# Altium PCB PCB7.pcbdoc
Units mil, origin at the board's own origin, x right, y up, seen from the top; angles counter-clockwise.
Board outline 1995.04 x 1323.62 mil, 2 copper layers (Top Layer, Bottom Layer); 6 components, 6 nets, 24 pads, 0 vias.
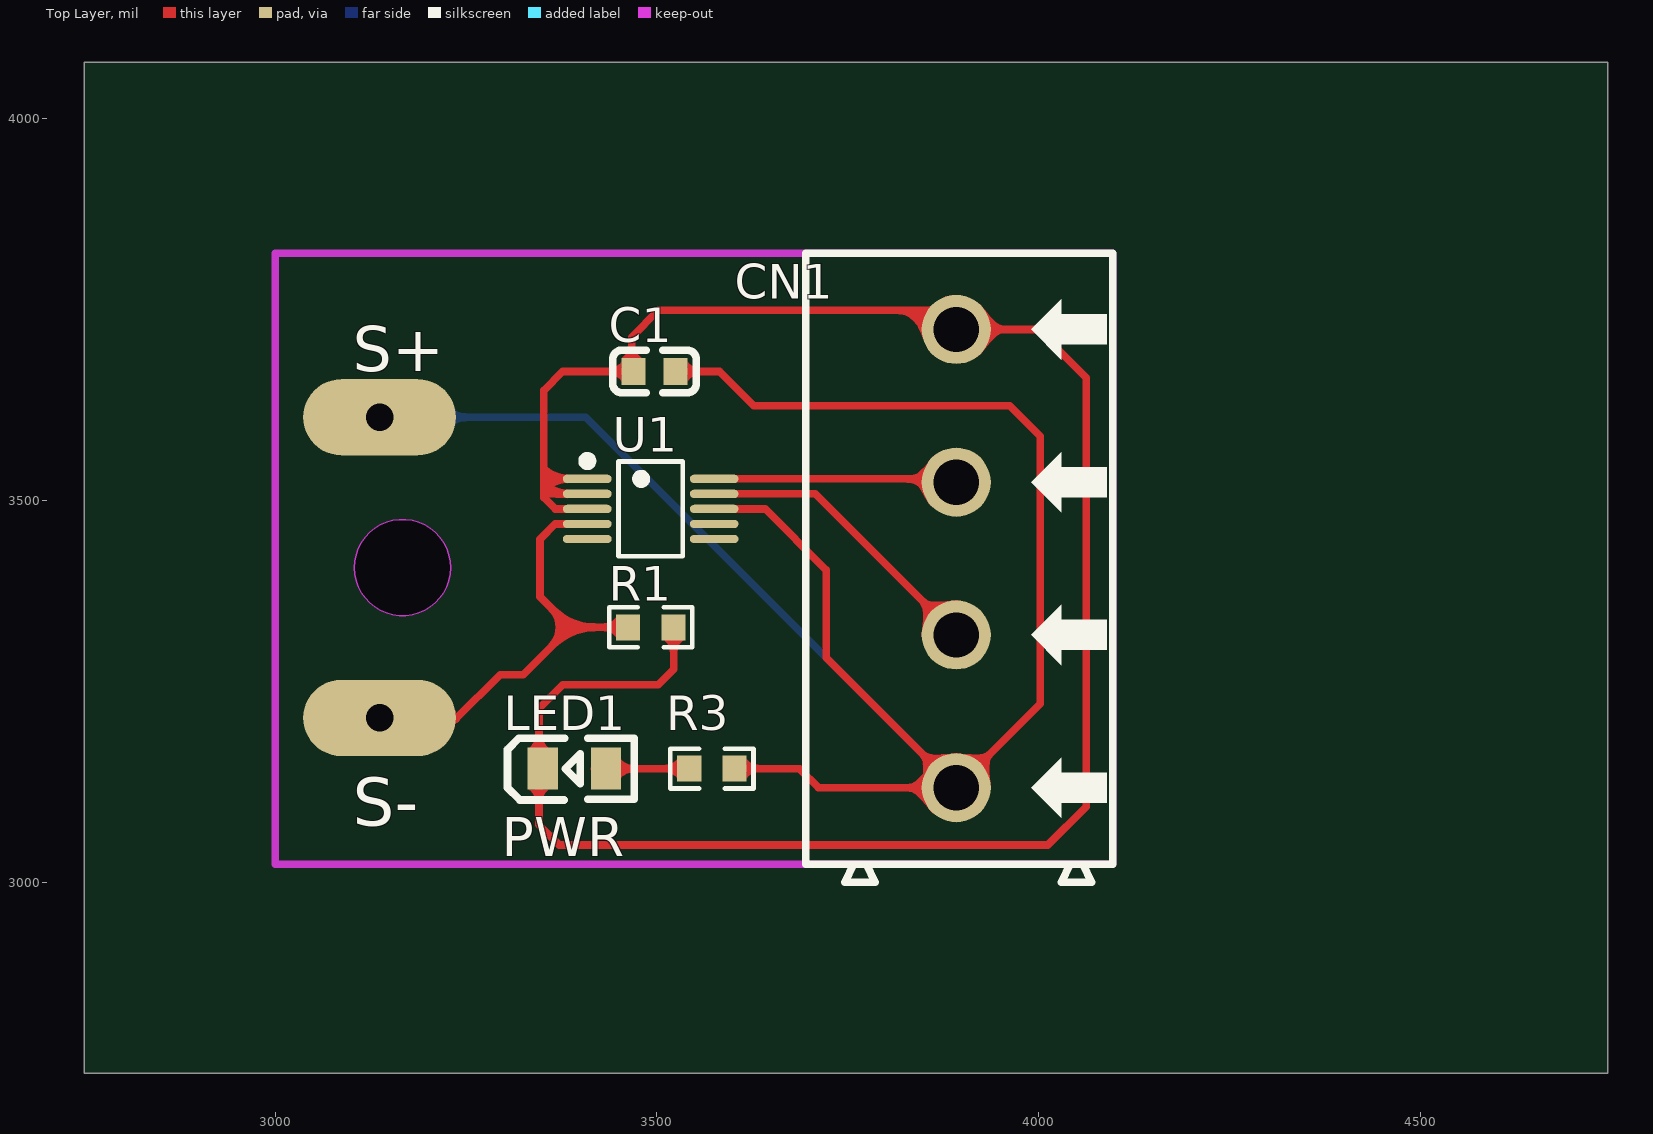
[diagram p0: Top Layer view]
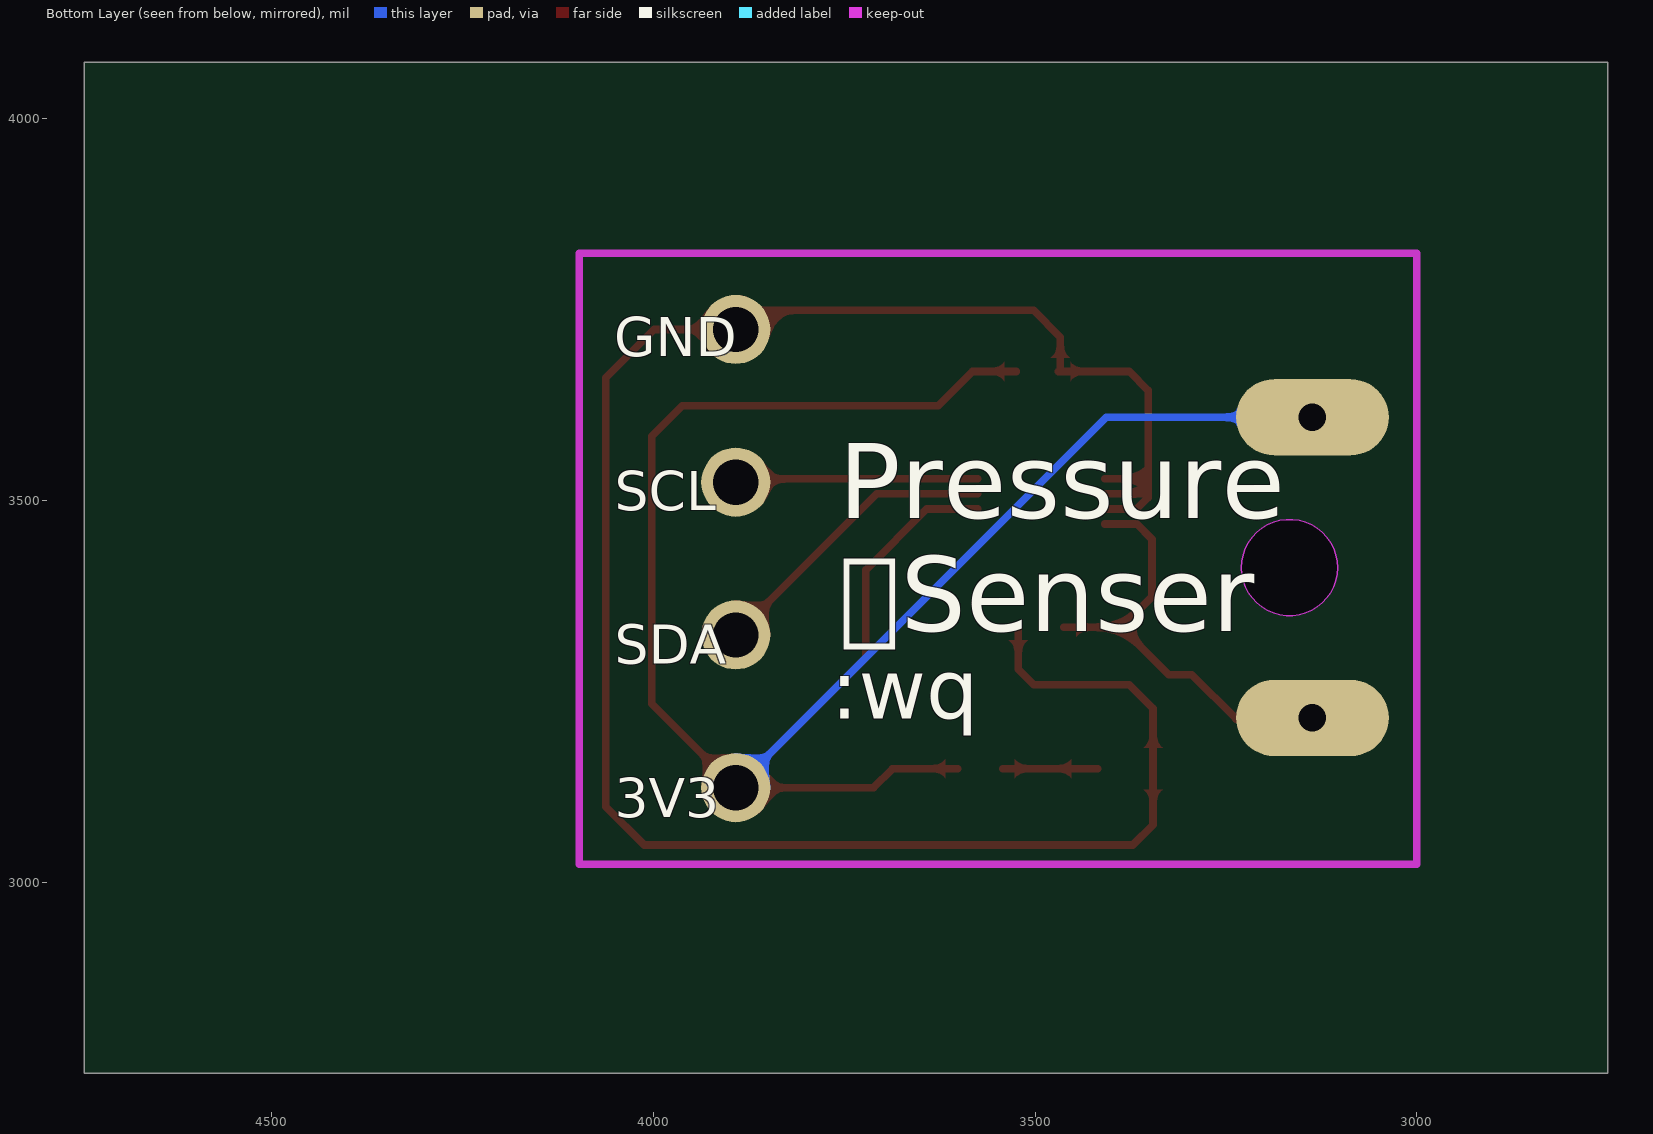
[diagram p1: Bottom Layer view, seen from below]

## Layer stack, top to bottom
Top Layer: signal copper (thickness not stored)
Dielectric: dielectric 12.6, FR-4, Dk 4.8
Bottom Layer: signal copper (thickness not stored)

## Board outline
4745.04,2750 2750,2750 2750,4073.62 4745.04,4073.62
cut-out: 3229.84,3411.81 cw(c3166.85,3411.81) 3103.86,3411.81 cw(c3166.85,3411.81)

## Design rules (kind name [scope] priority, off if disabled: settings)
BoardOutlineClearance copperThickness1oz [All] p0: genericclearance=10 ignorepadtopadclearanceinfootprint=FALSE except(0: Arc-SplitContinuation Track-SplitContinuation SMDPad-SplitContinuation THPad-SplitContinuation Via-SplitContinuation Fill-SplitContinuation Poly-SplitContinuation Region-SplitContinuation Text-SplitContinuation; 6: Track-CutoutEdge SMDPad-CutoutEdge THPad-CutoutEdge Via-CutoutEdge Region-CutoutEdge; 11.8: Track-OutlineEdge SMDPad-OutlineEdge THPad-OutlineEdge Via-OutlineEdge Fill-OutlineEdge Region-OutlineEdge Poly-OutlineEdge Text-OutlineEdge Fill-CutoutEdge)
BoardOutlineClearance copperThickness2oz [All] p0: genericclearance=10 ignorepadtopadclearanceinfootprint=FALSE except(0: Arc-SplitContinuation Track-SplitContinuation SMDPad-SplitContinuation THPad-SplitContinuation Via-SplitContinuation Fill-SplitContinuation Poly-SplitContinuation Region-SplitContinuation Text-SplitContinuation; 6: Track-CutoutEdge SMDPad-CutoutEdge THPad-CutoutEdge Via-CutoutEdge Region-CutoutEdge; 11.8: Track-OutlineEdge SMDPad-OutlineEdge THPad-OutlineEdge Via-OutlineEdge Fill-OutlineEdge Region-OutlineEdge Poly-OutlineEdge Text-OutlineEdge Fill-CutoutEdge)
Clearance copperThickness1oz [(InNet('VCC') OR InNet('GND') OR InNet('SCL') OR InNet('SDA') OR InNet('$1N415') OR InNet('$1N872'))] p1: gap=7 ignorepadtopadclearanceinfootprint=FALSE except(4: Track-Track; 6: Track-SMDPad SMDPad-SMDPad Track-THPad SMDPad-THPad THPad-THPad Track-Via SMDPad-Via THPad-Via Via-Via SMDPad-Fill THPad-Fill Via-Fill Fill-Fill Track-Region SMDPad-Region THPad-Region Via-Region Region-Region Track-Poly SMDPad-Poly THPad-Poly Via-Poly Fill-Poly Region-Poly Poly-Poly Track-Text SMDPad-Text THPad-Text Via-Text Fill-Text Region-Text Poly-Text Text-Text; 6.9: Track-Hole SMDPad-Hole THPad-Hole Via-Hole Fill-Hole Region-Hole Poly-Hole Text-Hole Sheet-Hole; 11.8: Track-Fill Fill-Region Track-Sheet SMDPad-Sheet THPad-Sheet Via-Sheet Fill-Sheet Region-Sheet Poly-Sheet Text-Sheet)
Clearance copperThickness2oz [All] p1: gap=7 ignorepadtopadclearanceinfootprint=FALSE except(6: Track-SMDPad SMDPad-SMDPad Track-THPad SMDPad-THPad THPad-THPad Track-Via SMDPad-Via THPad-Via Via-Via SMDPad-Fill THPad-Fill Via-Fill Fill-Fill Track-Region SMDPad-Region THPad-Region Via-Region Region-Region Track-Poly SMDPad-Poly THPad-Poly Via-Poly Fill-Poly Region-Poly Poly-Poly Track-Text SMDPad-Text THPad-Text Via-Text Fill-Text Region-Text Poly-Text Text-Text; 6.9: Track-Hole SMDPad-Hole THPad-Hole Via-Hole Fill-Hole Region-Hole Poly-Hole Text-Hole Sheet-Hole; 8: Track-Track; 11.8: Track-Fill Fill-Region Track-Sheet SMDPad-Sheet THPad-Sheet Via-Sheet Fill-Sheet Region-Sheet Poly-Sheet Text-Sheet)
DiffPairsRouting differentialPair [All] p1: maxuncoupledlength=10 minlimit=6 maxlimit=6 mostfreqgap=6 toplayer_minwidth=5 toplayer_prefwidth=10 toplayer_maxwidth=100 bottomlayer_minwidth=5 bottomlayer_prefwidth=10 bottomlayer_maxwidth=100
PasteMaskExpansion pasteMaskExpansion [All] p1: expansion=0
PlaneConnect innerPlane [All] p1: planeconnectstyle=Relief reliefexpansion=20 reliefentries=4 reliefconductorwidth=10 reliefairgap=10
PolygonConnect copperRegion [All] p1: connectstyle=Relief reliefentries=4 reliefconductorwidth=10 polygonreliefangle="90 Angle" airgapwidth=10
RoutingVias viaSize [All] p1: viastyle="Through Hole" holewidth=12.0078 minholewidth=11.811 maxholewidth=248.0314 width=24.0158 minwidth=19.685 maxwidth=393.7008
SolderMaskExpansion solderMaskExpansion [All] p1: useseparateexpansions=TRUE expansion=2 expansionbottom=2
Width copperThickness1oz [All] p1: maxlimit=100 minlimit=5 preferedwidth=10
Width copperThickness2oz [All] p1: maxlimit=100 minlimit=8 preferedwidth=10

## Components (designator, comment, footprint, x,y, rotation, side; value= is the part's Value field where it differs from the comment)
C1 "CGA0603X7R104K500JT" C0603 3496.85,3668.62 r0 top
CN1 "DB128V-5.08-4P-GN-S" CONN-TH_4P-P5.08_DIBO_DB128V-5.08 3891.85,3423.62 r90 top
LED1 "NCD0805R1" LED0805-R-RD 3391.85,3148.62 r0 top
R1 "FRC0603J103 TS" R0603 3491.85,3333.62 r180 top
R3 "0603WAF1000T5E" R0603 3571.85,3148.62 r180 top
U1 "ADS1115IDGSR" MSOP-10_L3.0-W3.0-P0.50-LS5.0-BL 3491.85,3488.62 r270 top

## Footprints (in the part's own frame and the unit in brackets; to place one, negate y for a bottom-side part, rotate by r counter-clockwise, add the part's x,y. Pads: shape width x height; smd on the part's side, far side on the other; paste and mask are expansions set on the pad)
C0603 [mm]
  rect 0.8x0.9 smd: 1(-0.7,0) 2(0.7,0)
  silkscreen extent -1.39,-0.71 1.39,0.71
CONN-TH_4P-P5.08_DIBO_DB128V-5.08 [mm]
  round 2.3 hole 1.5: 1(-7.62,0) 2(-2.54,0) 3(2.54,0) 4(7.62,0)
  silkscreen extent -10.76,-5.2 10.16,5
LED0805-R-RD [mm]
  rect 1x1.4 smd: 1(1.05,0) 2(-1.05,0)
  silkscreen extent -2.22,-1.04 1.99,1.01
MSOP-10_L3.0-W3.0-P0.50-LS5.0-BL [mm]
  oval 0.28x1.62 smd: 1(-1,-2.11) 2(-0.5,-2.11) 3(0,-2.11) 4(0.5,-2.11) 5(1,-2.11) 6(1,2.11) 7(0.5,2.11) 8(0,2.11) 9(-0.5,2.11) 10(-1,2.11)
  silkscreen extent -1.74,-2.26 1.58,1.07
R0603 [mil]
  rect 31.75x34.02 smd: 1(-29.66,0) 2(29.66,0)
  silkscreen extent -55,-26 55,26

## Free pads (board coordinates)
  oval 200x100 hole 36: 1(3136.85,3214.96) 1(3136.85,3608.66)

## Nets (pads, with @x,y where several pads share a name; then routed paths per layer and width w, separated by ;. In a path a pad name is that pad's centre, name@x,y a point inside that pad or via, vN(x,y) a via of type N, cw(c..) or ccw(c..) an arc to the next point about the centre after c; other vN are vias at no path point)
$1N415: pad.1@3136.85,3214.96 R1.2 U1.4 | length 645.3
  Top Layer w10: pad.1@3068.7,3213.62 3236.85,3213.62 3294.97,3271.75 3324.97,3271.75 3386.85,3333.62 ; U1.4 3366.85,3468.93 3346.85,3448.93 3346.85,3373.62 3386.85,3333.62 ; R1.2 3386.85,3333.62
$1N872: LED1.1 R3.2 | length 124
  Top Layer w10: LED1.1@3418.2,3148.62 R3.2
GND: C1.1 CN1.4 LED1.2 R1.1 U1.1 U1.2 U1.3 | length 2853.4
  Top Layer w10: U1.3 3366.85,3488.62 3351.85,3503.62 ; U1.2 3356.53,3508.3 3351.85,3503.62 ; U1.1 3354.07,3527.99 3351.85,3525.77 ; C1.1 C1.1@3466.85,3668.62 ; R1.1@3521.85,3333.62 3521.85,3278.62 3501.85,3258.62 3376.85,3258.62 3345.5,3227.27 3345.5,3074.97 3371.85,3048.62 4011.85,3048.62 4061.85,3098.62 4061.85,3660.47 3998.7,3723.62 CN1.4 3866.85,3748.62 3501.85,3748.62 3466.85,3713.62 C1.1@3466.85,3668.62 ; 3351.85,3503.62 3351.85,3525.77 ; 3351.85,3525.77 3351.85,3643.62 3376.85,3668.62 C1.1@3466.85,3668.62
SCL: CN1.3 U1.10 | length 318.7
  Top Layer w10: U1.10 3887.48,3527.99 CN1.3
SDA: CN1.2 U1.9 | length 393.4
  Top Layer w10: U1.9 3707.17,3508.3 CN1.2
VCC: C1.2 CN1.1 pad.1@3136.85,3608.66 R3.1 U1.8 | length 2877.1
  Top Layer w10: C1.2 3581.85,3668.62 3626.85,3623.62 3961.85,3623.62 4001.85,3583.62 4001.85,3233.62 CN1.1 ; U1.8 3641.85,3488.62 3721.85,3408.62 3721.85,3293.62 CN1.1 ; R3.1 3686.6,3148.62 3711.6,3123.62 CN1.1
  Bottom Layer w10: pad.1@3070,3608.62 3406.85,3608.62 CN1.1
pads on no net: U1.5 U1.6 U1.7

## Keep-outs
Board Outline Layer:
  circle w1: c3166.85,3411.81 r62.99
  region: 3229.84,3411.81 cw(c3166.85,3411.81) 3103.86,3411.81 cw(c3166.85,3411.81)
  lines w10: 3000,3023.62 4096.57,3023.62 4096.57,3823.62 3000,3823.62 3000,3023.62

## Other copper
Top Layer:
  region net VCC: 3555.16,3673.62 3555.16,3663.62 ccw(c3555.16,3644.87) 3540.16,3656.12 3540.16,3681.12 ccw(c3555.16,3692.37)
  region net GND: 3438.54,3663.62 3438.54,3673.62 ccw(c3438.54,3692.37) 3453.54,3681.12 3453.54,3656.12 ccw(c3438.54,3644.87)
  region net GND: 3461.85,3701.34 3471.85,3701.34 ccw(c3490.6,3701.34) 3479.35,3686.34 3454.35,3686.34 ccw(c3443.1,3701.34)
  region net $1N415: 3431.31,3328.62 3431.31,3338.62 ccw(c3431.31,3357.37) 3446.31,3346.12 3446.31,3321.12 ccw(c3431.31,3309.87)
  region net GND: 3526.85,3301.61 3516.85,3301.61 ccw(c3498.1,3301.61) 3509.35,3316.61 3534.35,3316.61 ccw(c3545.6,3301.61)
  region net GND: 3367.4,3522.99 3367.4,3532.99 3377.34,3533.25 3382.4,3533.5 3382.4,3522.48 3377.34,3522.74
  region net GND: 3367.4,3503.3 3367.4,3513.3 3377.34,3513.56 3382.4,3513.81 3382.4,3502.79 3377.34,3503.05
  region net GND: 3350.5,3106.07 3340.5,3106.07 ccw(c3321.75,3106.07) 3333,3121.07 3358,3121.07 ccw(c3369.25,3106.07)
  region net GND: 3340.5,3191.17 3350.5,3191.17 ccw(c3369.25,3191.17) 3358,3176.17 3333,3176.17 ccw(c3321.75,3191.17)
  region net $1N872: 3467.89,3153.62 3467.89,3143.62 ccw(c3467.89,3124.87) 3452.89,3136.12 3452.89,3161.12 ccw(c3467.89,3172.37)
  region net $1N872: 3511.31,3143.62 3511.31,3153.62 ccw(c3511.31,3172.37) 3526.31,3161.12 3526.31,3136.12 ccw(c3511.31,3124.87)
  region net VCC: 3632.39,3153.62 3632.39,3143.62 ccw(c3632.39,3124.87) 3617.39,3136.12 3617.39,3161.12 ccw(c3632.39,3172.37)
  region net $1N415: 3236.85,3218.62 3236.85,3208.62 3236.23,3208.38 3235.8,3207.72 3235.53,3206.75 3235.35,3205.59 3235.17,3203.12 3234.91,3201.17 3235.58,3226.16 3235.69,3224.19 3235.65,3221.68 3235.71,3220.51 3235.9,3219.53 3236.26,3218.87
  region net GND: 3386.85,3522.99 ccw(c3386.85,3472.99) 3356.85,3512.99 3351.85,3525.77 3356.85,3542.99 ccw(c3386.85,3582.99) 3386.85,3532.99
  region net GND: 3386.85,3513.3 cw(c3386.85,3563.3) 3356.85,3523.3 3351.85,3508.3
  region net $1N415: 3418.92,3338.62 cw(c3418.92,3411.05) 3367.71,3359.83 3358.57,3354.83 cw(c3337.35,3333.62) 3358.57,3312.41 3367.71,3307.41 cw(c3418.92,3256.19) 3418.92,3328.62
  region net GND: 3953.49,3728.62 3953.49,3718.62 3951.42,3718.38 3949.32,3717.67 3947.2,3716.57 3945.07,3715.11 3942.94,3713.36 3940.82,3711.37 3936.62,3706.86 3932.55,3702.01 3928.67,3697.24 3925.07,3692.99 3921.8,3689.66 3921.8,3757.58 3925.07,3754.26 3928.67,3750 3932.55,3745.23 3936.62,3740.38 3940.82,3735.87 3942.94,3733.88 3945.07,3732.13 3947.2,3730.67 3949.32,3729.57 3951.42,3728.87
  region net GND: 3816.44,3743.62 3853.94,3753.62 3856.99,3753.76 3859.61,3754.16 3861.88,3754.79 3863.84,3755.6 3865.55,3756.58 3867.09,3757.68 3869.85,3760.14 3872.6,3762.71 3874.13,3763.96 3875.83,3765.13 3877.77,3766.21 3880.01,3767.14 3882.61,3767.9 3885.63,3768.47 3848.13,3711.85 3847.25,3714.82 3846.22,3717.77 3845.03,3720.68 3843.69,3723.51 3842.2,3726.26 3840.56,3728.88 3838.78,3731.37 3836.85,3733.69 3834.78,3735.83 3832.57,3737.76 3830.22,3739.45 3827.73,3740.89 3825.11,3742.05 3822.35,3742.91 3819.46,3743.44
  region net SCL: 3827.07,3522.99 3833.63,3532.99 3835.8,3533.22 3837.95,3533.88 3840.07,3534.93 3842.17,3536.3 3844.24,3537.95 3846.29,3539.83 3850.3,3544.09 3858.02,3553.16 3861.72,3557.17 3863.54,3558.88 3865.32,3560.31 3858.77,3492.71 3856.31,3495.55 3854.19,3498.36 3852.36,3501.13 3850.76,3503.83 3847.99,3508.95 3845.38,3513.53 3844,3515.57 3842.48,3517.4 3840.75,3519.02 3838.78,3520.39 3836.48,3521.49 3833.8,3522.31 3830.69,3522.82
  region net SDA: 3844.73,3363.67 3851.8,3370.74 3853.44,3369.45 3855.42,3368.47 3857.7,3367.75 3860.23,3367.27 3862.98,3367 3865.89,3366.91 3872.05,3367.13 3878.36,3367.68 3884.46,3368.31 3890.02,3368.77 3894.69,3368.81 3846.66,3320.79 3846.7,3325.45 3847.16,3331.01 3847.79,3337.11 3848.34,3343.42 3848.56,3349.58 3848.47,3352.5 3848.2,3355.24 3847.72,3357.78 3847.01,3360.05 3846.02,3362.03
  region net VCC: 3931.9,3170.74 3938.97,3163.67 3937.68,3162.03 3936.69,3160.05 3935.98,3157.78 3935.5,3155.24 3935.23,3152.5 3935.14,3149.58 3935.36,3143.42 3935.91,3137.11 3936.54,3131.01 3937,3125.45 3937.04,3120.79 3889.01,3168.81 3893.68,3168.77 3899.24,3168.31 3905.34,3167.68 3911.65,3167.13 3917.81,3166.91 3920.72,3167 3923.47,3167.27 3926,3167.75 3928.28,3168.47 3930.26,3169.45
  region net VCC: 3844.73,3163.67 3851.8,3170.74 3853.44,3169.45 3855.42,3168.47 3857.7,3167.75 3860.23,3167.27 3862.98,3167 3865.89,3166.91 3872.05,3167.13 3878.36,3167.68 3884.46,3168.31 3890.02,3168.77 3894.69,3168.81 3846.66,3120.79 3846.7,3125.45 3847.16,3131.01 3847.79,3137.11 3848.34,3143.42 3848.56,3149.58 3848.47,3152.5 3848.2,3155.24 3847.72,3157.78 3847.01,3160.05 3846.02,3162.03
  region net VCC: 3830.21,3118.62 3830.21,3128.62 3832.28,3128.87 3834.38,3129.57 3836.5,3130.67 3838.63,3132.13 3840.76,3133.88 3842.88,3135.87 3847.08,3140.38 3851.15,3145.23 3855.03,3150 3858.63,3154.26 3861.9,3157.58 3861.9,3089.66 3858.63,3092.99 3855.03,3097.24 3851.15,3102.01 3847.08,3106.86 3842.88,3111.37 3840.76,3113.36 3838.63,3115.11 3836.5,3116.57 3834.38,3117.67 3832.28,3118.38
Bottom Layer:
  region net VCC: 3250.27,3613.62 3250.25,3603.62 3247.8,3603.56 3245.38,3603.34 3243.07,3602.91 3240.92,3602.24 3239,3601.27 3237.37,3599.96 3236.1,3598.26 3235.62,3597.25 3235.25,3596.12 3235.27,3621.12 3235.64,3620 3236.12,3618.98 3237.38,3617.28 3239.01,3615.97 3240.93,3615 3243.08,3614.33 3245.4,3613.9 3247.82,3613.68
  region net VCC: 3844.73,3163.67 3851.8,3170.74 3853.44,3169.45 3855.42,3168.47 3857.7,3167.75 3860.23,3167.27 3862.98,3167 3865.89,3166.91 3872.05,3167.13 3878.36,3167.68 3884.46,3168.31 3890.02,3168.77 3894.69,3168.81 3846.66,3120.79 3846.7,3125.45 3847.16,3131.01 3847.79,3137.11 3848.34,3143.42 3848.56,3149.58 3848.47,3152.5 3848.2,3155.24 3847.72,3157.78 3847.01,3160.05 3846.02,3162.03

## Silkscreen, mask and mechanical layers (free items; w line width, h text height)
Top Silkscreen Layer:
  text "S+" at 3101.85,3668.62 h59.06
  text "S-" at 3101.7,3073.62 h62.99
  text "PWR" at 3296.85,3033.62 h51.18
Bottom Silkscreen Layer:
  text "GND" at 4050.98,3688.62 h51.18
  text "SCL" at 4050.21,3487.14 h51.18
  text "Pressure /  Senser" at 3756.85,3328.62 h98.43
  text "SDA" at 4050.21,3285.74 h51.18
  text ":wq" at 3767.43,3213.62 h78.74
  text "3V3" at 4050.36,3084.81 h51.18
Mechanical Layer:
  circle w1: c3166.85,3411.81 r62.99